# Altium PCB Apollp.PcbDoc
Units mil, origin at the board's own origin, x right, y up, seen from the top; angles counter-clockwise.
Board outline 6530 x 3625 mil, 2 copper layers (Top Layer, Bottom Layer); 146 components, 117 nets, 485 pads, 150 vias.
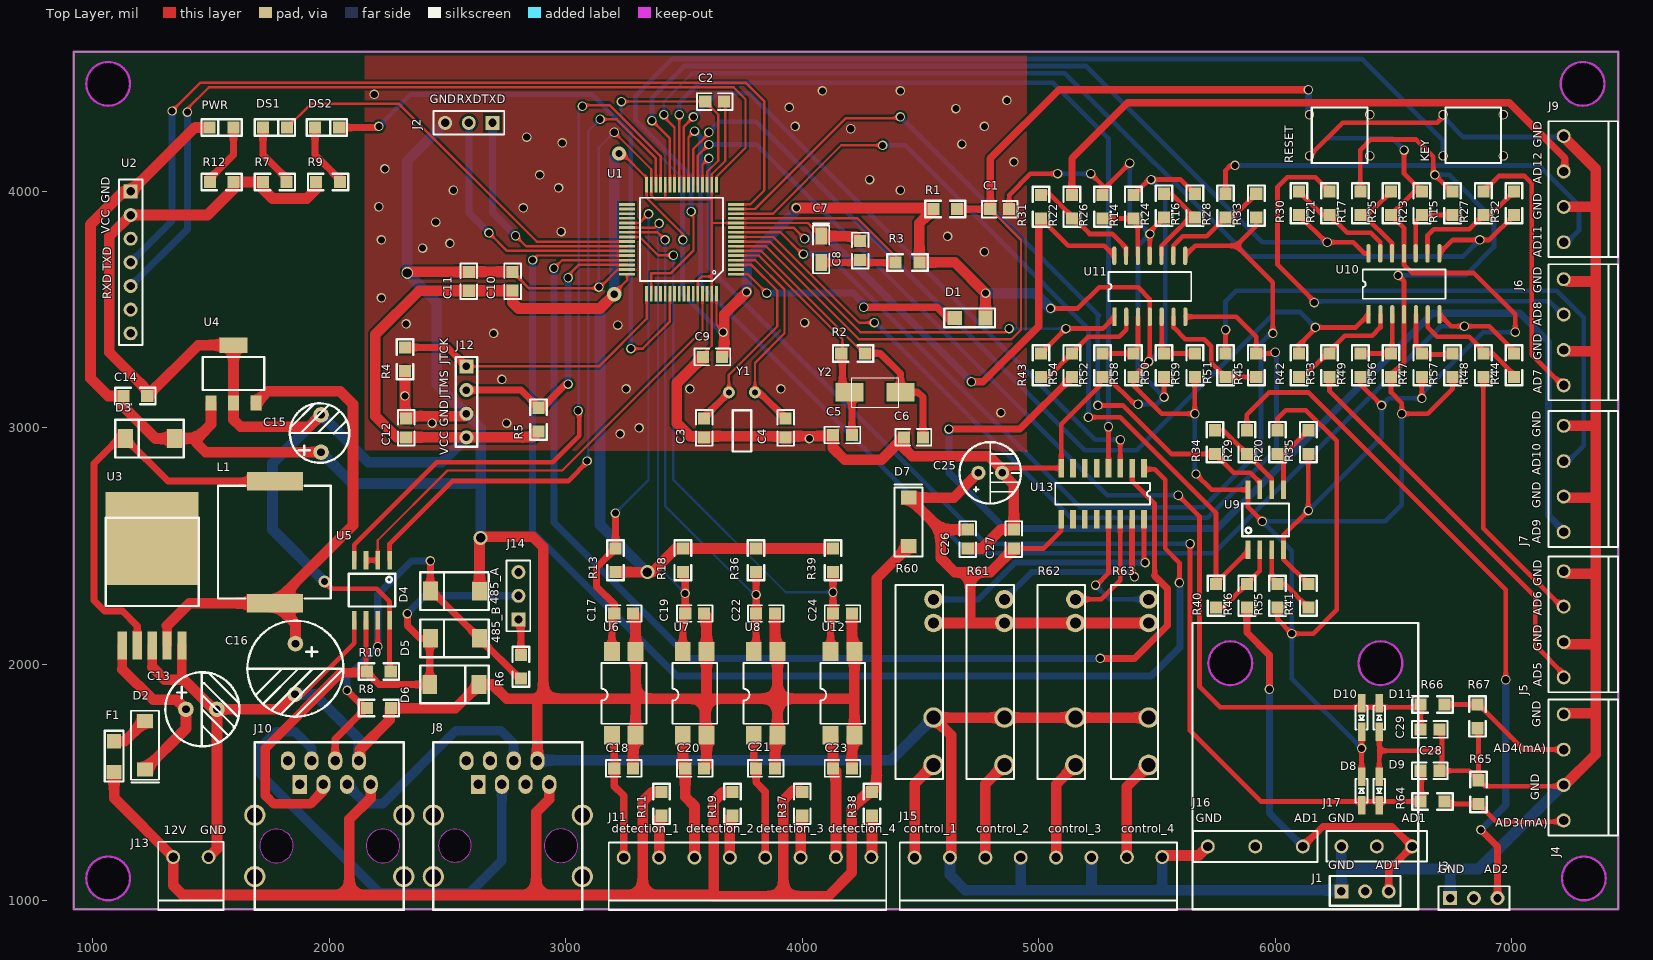
[diagram p0: Top Layer view]
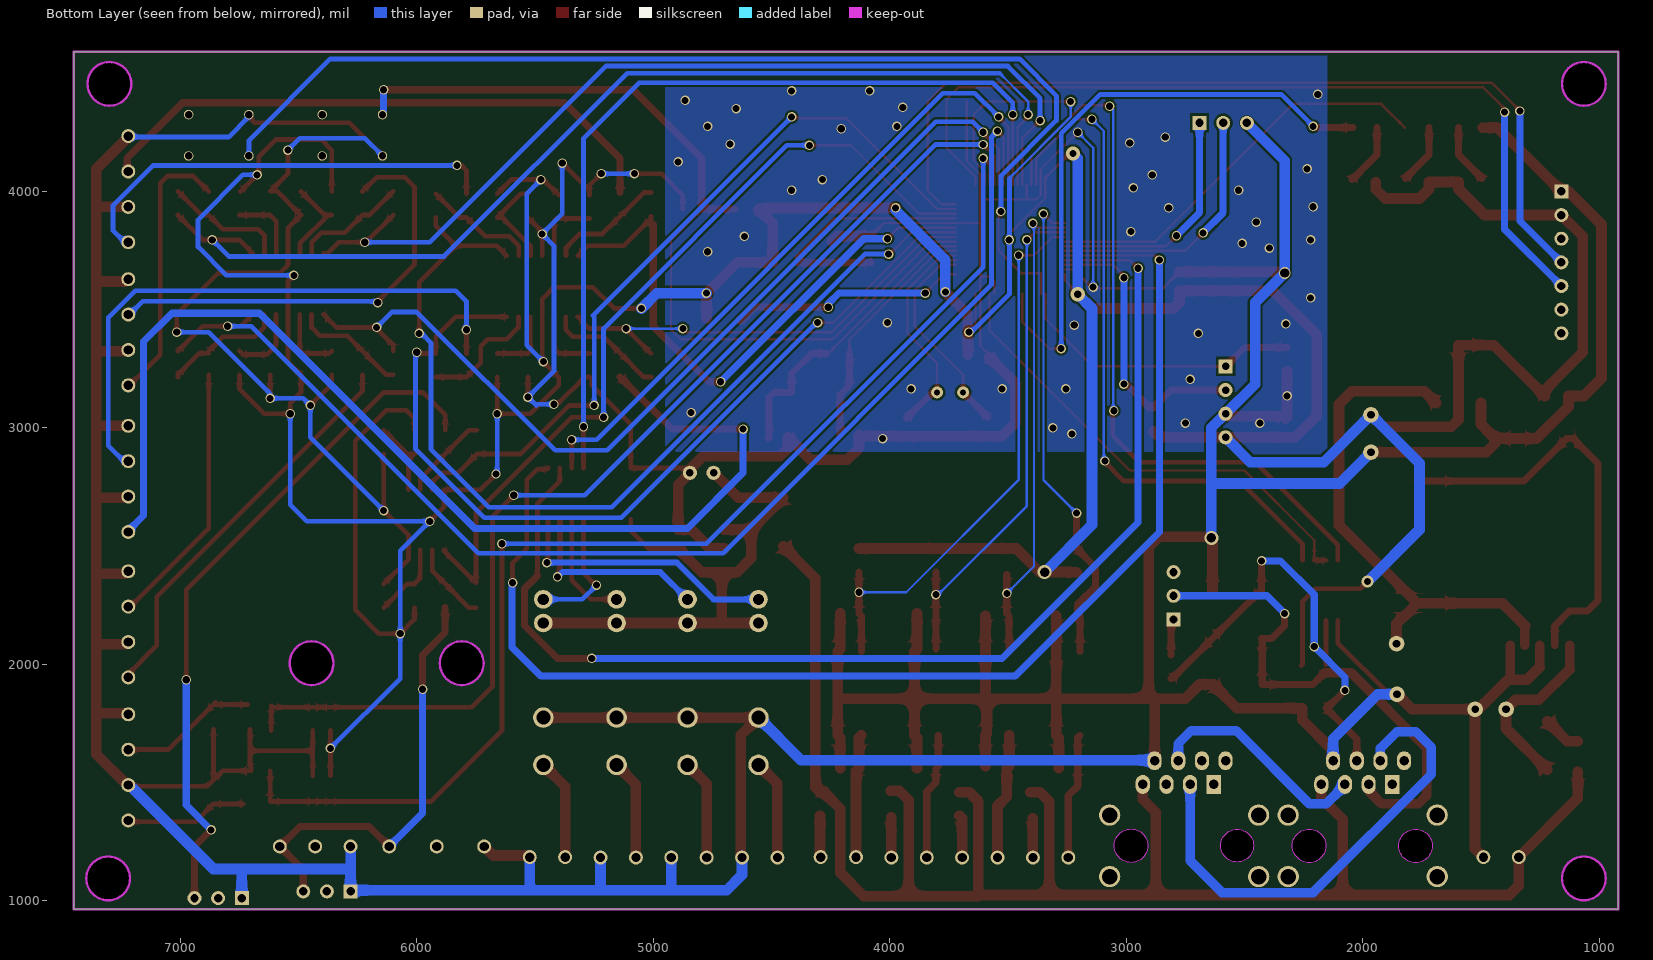
[diagram p1: Bottom Layer view, seen from below]

## Layer stack, top to bottom
Top Solder: solder mask 0.4, Solder Resist, Dk 3.5
Top Layer: signal copper 1.4
Dielectric 1: dielectric 12.6, FR-4, Dk 4.8
Bottom Layer: signal copper 1.4
Bottom Solder: solder mask 0.4, Solder Resist, Dk 3.5

## Board outline
920,965 920,4590 7450,4590 7450,965
cut-out: 1065,4362.48 cw(c1065,4455) 972.48,4455 cw(c1065,4455) 1065,4547.52 cw(c1065,4455) 1157.52,4455 cw(c1065,4455)
cut-out: 1065,1002.48 cw(c1065,1095) 972.48,1095 cw(c1065,1095) 1065,1187.52 cw(c1065,1095) 1157.52,1095 cw(c1065,1095)
cut-out: 7212.48,1095 ccw(c7305,1095) 7305,1002.48 ccw(c7305,1095) 7397.52,1095 ccw(c7305,1095) 7305,1187.52 ccw(c7305,1095)
cut-out: 7207.48,4455 ccw(c7300,4455) 7300,4362.48 ccw(c7300,4455) 7392.52,4455 ccw(c7300,4455) 7300,4547.52 ccw(c7300,4455)
cut-out: 5717.48,2005 ccw(c5810,2005) 5810,1912.48 ccw(c5810,2005) 5902.52,2005 ccw(c5810,2005) 5810,2097.52 ccw(c5810,2005)
cut-out: 6352.48,2005 ccw(c6445,2005) 6445,1912.48 ccw(c6445,2005) 6537.52,2005 ccw(c6445,2005) 6445,2097.52 ccw(c6445,2005)
cut-out: 1705.44,1232.33 ccw(c1776.5,1232.33) 1776.5,1161.26 ccw(c1776.5,1232.33) 1847.56,1232.33 ccw(c1776.5,1232.33) 1776.5,1303.39 ccw(c1776.5,1232.33)
cut-out: 2155.44,1232.67 ccw(c2226.5,1232.67) 2226.5,1161.61 ccw(c2226.5,1232.67) 2297.56,1232.67 ccw(c2226.5,1232.67) 2226.5,1303.74 ccw(c2226.5,1232.67)
cut-out: 2461.41,1233.19 ccw(c2530.87,1233.19) 2530.87,1163.73 ccw(c2530.87,1233.19) 2600.33,1233.19 ccw(c2530.87,1233.19) 2530.87,1302.65 ccw(c2530.87,1233.19)
cut-out: 2908.31,1233 ccw(c2979.37,1233) 2979.37,1161.94 ccw(c2979.37,1233) 3050.43,1233 ccw(c2979.37,1233) 2979.37,1304.07 ccw(c2979.37,1233)

## Design rules (kind name [scope] priority, off if disabled: settings)
Clearance [InPolygon] p1: gap=10
HoleSize [All] p1: absolutevalues=TRUE maxlimit=100 minlimit=10 maxpercent=80.000 minpercent=20.000
MinimumSolderMaskSliver [All] p1: minsoldermaskwidth=20
PolygonConnect [All] p1: connectstyle=Direct reliefconductorwidth=10 reliefentries=4 polygonreliefangle="90 Angle" airgapwidth=10
RoutingPriority [All] p1: routingpriority=10
RoutingVias [All] p1: holewidth=28 width=50 viastyle="Through Hole" minholewidth=28 minwidth=50 maxholewidth=28 maxwidth=50
SolderMaskExpansion [All] p1: expansion=4
Width [All] p1: maxlimit=50 minlimit=1 preferedwidth=10
27 further rules are at their usual default settings.

## Classes and differential pairs
component class Apollo_3: C25 C26 C27 C28 C29 D7 D8 D9 D10 D11 J16 J17 R60 R61 R62 R63 R64 R65 R66 R67 U13
component class Apollo_2: C13 C14 C15 C16 C17 C18 C19 C20 C21 C22 C23 C24 D2 D3 D4 D5 D6 DS1 DS2 F1 J13 J14 KEY KEY1 L1 PWR R6 R7 R8 R9 R10 R11 R12 R13 R14 R15 R16 R17 R18 R19 R20 R21 R22 R23 R24 R25 R26 R27 R28 R29 R30 R31 R32 R33 R34 R35 R36 R37 R38 R39 R40 R41 R42 R43 R44 R45 R46 R47 R48 R49 R50 R51 R52 R53 R54 R55 R56 R57 R58 R59 U2 U3 U4 U5 U6 U7 U8 U9 U10 U11 U12
component class Apollo_1: C1 C2 C3 C4 C5 C6 C7 C8 C9 C10 C11 C12 D1 J1 J2 J3 J4 J5 J6 J7 J8 J9 J10 J11 J12 R1 R2 R3 R4 R5 RESET RESET1 U1 Y1 Y2

## Components (designator, comment, footprint, x,y, rotation, side; value= is the part's Value field where it differs from the comment)
C1 "Cap" 0805C 4795,3925 r0 top
C2 "Cap" 0805C 3590,4380 r0 top
C3 "Cap" 0805C 3585,2960 r90 top
C4 "Cap" 0805C 3930,2960 r90 top
C5 "Cap" 0805C 4130,2970 r0 top
C6 "Cap" 0805C 4510,2960 r180 top
C7 "10uF" 3216T 4080,3810 r270 top
C8 "Cap" 0805c 4245,3710 r90 top
C9 "Cap" 0805C 3660,3300 r180 top
C10 "Cap" 0805C 2775,3660 r270 top
C11 "Cap" 0805C 2590,3580 r90 top
C12 "Cap" 0805C 2325,3040 r270 top
C13 "" "cap3.3-8 - duplicate" 1525,1810 r180 top
C14 "Cap" 0805 1130,3135 r0 top
C15 "Cap Pol1" C15 1965,3055 r270 top
C16 "" C16 1855,1905 r90 top
C17 "" 0805C 3285,2215 r180 top
C18 "" 0805C 3285,1560 r180 top
C19 "" 0805C 3585,2215 r180 top
C20 "" 0805C 3585,1560 r180 top
C21 "" 0805C 3885,1560 r180 top
C22 "" 0805C 3885,2215 r180 top
C23 "" 0805C 4210,1560 r180 top
C24 "" 0805C 4210,2215 r180 top
C25 "220UF" "RB 2.5/6.3" 4845,2810 r180 top
C26 "104" 0805C 4700,2490 r90 top
C27 "104" 0805C 4895,2569.8 r270 top
C28 "104" 0805C 6694.02,1550 r180 top
C29 "104" 0805C 6694.02,1725 r180 top
D1 "Diode 1N914" 1206 4775,3465 r180 top
D2 "M7" "SMA (DO-214AC)" 1220,1555 r90 top
D3 "1N5822" "smb do214aa" 1345,2955 r180 top
D4 "SMBJ6.5CA" "smb do214aa" 2635,2310 r180 top
D5 "SMBJ6.5CA" "smb do214aa" 2635,2110 r180 top
D6 "SMBJ6.5CA" "smb do214aa" 2425,1915 r0 top
D7 "M7" "SMA (DO-214AC)" 4450,2705 r270 top
D8 "1N4148" "SOD 323" 6365,1525.08 r270 top
D9 "1N4148" "SOD 323" 6440,1405 r90 top
D10 "1N4148" "SOD 323" 6365,1714.92 r90 top
D11 "1N4148" "SOD 323" 6440,1835 r270 top
DS1 "LED1" 0805-D 1719.81,4269.81 r0 top
DS2 "LED2" 0805-D 1939.81,4269.81 r0 top
F1 "PPTC" 1206 1090,1545 r90 top
J1 "Header 3" HDR1X3 6280,1040 r0 top
J2 "Header 3" HDR1X3 2690,4290 r180 top
J3 "Header 3" HDR1X3 6740,1011.54 r0 top
J4 "Header 4" "2EDG 4-3.80" 7220,1340 r0 top
J5 "Header 4" "2EDG 4-3.80" 7220,1945 r0 top
J6 "Header 4" "2EDG 4-3.80" 7220,3180 r0 top
J7 "Header 4" "2EDG 4-3.80" 7220,2560 r0 top
J8 "Header 8" RJ45 2630,1492.6 r270 top
J9 "Header 4" "2EDG 4-3.80" 7220,3785 r0 top
J10 "Header 8" RJ45 1875,1492.6 r270 top
J11 "Header 8" "2EDG 8-3.80" 3245,1183.03 r270 top
J12 "SWD" SWD 2580,3260 r0 top
J13 "Header 2" "2EDG 2-3.80" 1340,1185 r270 top
J14 "Header 3" HDR1X3 2800,2190 r90 top
J15 "Header 8" "2EDG 8-3.80" 4475,1183.03 r270 top
J16 "Header 3" "3EDG 3-5.08" 5715,1230 r270 top
J17 "Header 3" "3EDG 3-3.80" 6280,1230 r270 top
KEY "SW-PB" SWITCH 6720,4355 r0 top (schematic designator KEY1)
L1 "" l1212 1750,2755 r0 top
PWR "SYS" 0805-D 1594.81,4269.81 r180 top (schematic designator PWR1)
R1 "Res2" 0805 4655,3925 r180 top
R2 "Res2" 0805 4265,3315 r180 top
R3 "Res2" 0805 4395,3700 r0 top
R4 "Res2" 0805 2320,3240 r90 top
R5 "Res2" 0805 2885,3085 r270 top
R6 "120" 0805 2810,2040 r270 top
R7 "" 0805 1819.81,4039.4 r180 top
R8 "1K" 0805 2160,1815 r0 top
R9 "" 0805 2044.81,4039.4 r180 top
R10 "1K" 0805 2260,1970 r180 top
R11 "1.6K" 0805 3405,1460 r270 top
R12 "" 0805 1494.81,4039.4 r0 top
R13 "10K" 0805 3210,2390 r90 top
R14 "100K" 0805 5400,3985 r270 top
R15 "100K" 0805 6750,4000 r270 top
R16 "100K" 0805 5660,3990 r270 top
R17 "100K" 0805 6360,4000 r270 top
R18 "10K" 0805 3495,2490 r270 top
R19 "1.6K" 0805 3705,1460 r270 top
R20 "100K" 0805 6010,2890 r90 top
R21 "100K" 0805 6230,4000 r270 top
R22 "100K" 0805 5140,3985 r270 top
R23 "100K" 0805 6620,3900 r90 top
R24 "100K" 0805 5530,3990 r270 top
R25 "100K" 0805 6490,4000 r270 top
R26 "100K" 0805 5270,3885 r90 top
R27 "100K" 0805 6880,4000 r270 top
R28 "100K" 0805 5790,3990 r270 top
R29 "100K" 0805 5880,2890 r90 top
R30 "100K" 0805 6100,3900 r90 top
R31 "100K" 0805 5010,3885 r90 top
R32 "100K" 0805 7010,4000 r270 top
R33 "100K" 0805 5920,3990 r270 top
R34 "100K" 0805 5745,2990 r270 top
R35 "100K" 0805 6140,2990 r270 top
R36 "10K" 0805 3805,2490 r270 top
R37 "1.6K" 0805 4000,1460 r270 top
R38 "1.6K" 0805 4295,1460 r270 top
R39 "10K" 0805 4130,2490 r270 top
R40 "100K" 0805 5750,2240 r90 top
R41 "100K" 0805 6140,2240 r90 top
R42 "100K" 0805 6100,3215 r90 top
R43 "100K" 0805 5010,3215 r90 top
R44 "100K" 0805 7010,3315 r270 top
R45 "100K" 0805 5920,3315 r270 top
R46 "100K" 0805 5880,2240 r90 top
R47 "100K" 0805 6620,3315 r270 top
R48 "100K" 0805 6880,3215 r90 top
R49 "100K" 0805 6360,3315 r270 top
R50 "100K" 0805 5530,3315 r270 top
R51 "100K" 0805 5790,3315 r270 top
R52 "100K" 0805 5270,3315 r270 top
R53 "100K" 0805 6230,3215 r90 top
R54 "100K" 0805 5140,3215 r90 top
R55 "100K" 0805 6010,2240 r90 top
R56 "100K" 0805 6490,3215 r90 top
R57 "100K" 0805 6750,3215 r90 top
R58 "100K" 0805 5400,3215 r90 top
R59 "100K" 0805 5660,3215 r90 top
R60 "relay" HF49FD/012-1H11 4555,2275 r270 top
R61 "relay" HF49FD/012-1H11 4855,2275 r270 top
R62 "relay" HF49FD/012-1H11 5155,2275 r270 top
R63 "relay" HF49FD/012-1H11 5465,2275 r270 top
R64 "1K" 0805 6615,1420 r0 top
R65 "100" 0805 6860,1510.19 r270 top
R66 "1K" 0805 6615,1830 r0 top
R67 "100" 0805 6855,1730 r90 top
RESET "SW-PB" SWITCH 6155,4355 r0 top (schematic designator RESET1)
U1 "STM32F103RCT6" STM32F103RCT6 3719.84,3650 r180 top
U2 "YL-600N" HDR1X7 1160,4000 r270 top
U3 "LM2576" TO-263-5 1125,2080 r0 top
U4 "AMS1117-3.3" AMS1117-3.3 1465,3300 r0 top
U5 "SP3485" sop8 2255,2440 r270 top
U6 "EL814" SOP4 3195,1700 r90 top
U7 "EL814" SOP4 3495,1700 r90 top
U8 "EL814" SOP4 3795,1700 r90 top
U9 "LM358" sop8 5885,2485 r90 top
U10 "LM324" SOP-14 6395,3480 r90 top
U11 "LM324" SOP-14 5320,3470 r90 top
U12 "EL814" SOP4 4120,1700 r90 top
U13 "MC1413" "SOP 16-1.27/3.9" 5445,2830 r270 top
Y1 "XTAL" tc-26 3800,3150 r270 top
Y2 "8MHz" Y2 4415,3150 r180 top

## Footprints (in the part's own frame and the unit in brackets; to place one, negate y for a bottom-side part, rotate by r counter-clockwise, add the part's x,y. Pads: shape width x height; smd on the part's side, far side on the other; paste and mask are expansions set on the pad)
"2EDG 2-3.80" [mm]
  round 1.5 hole 1: 1(0,0) 2(0,3.8)
  silkscreen extent -1.65,-1.6 5.68,5.4
"2EDG 4-3.80" [mm]
  round 1.5 hole 1: 1(0,0) 2(0,3.8) 3(0,7.6) 4(0,11.4)
  silkscreen extent -1.65,-1.6 5.83,13
"2EDG 8-3.80" [mm]
  round 1.5 hole 1: 1(0,0) 2(0,3.8) 3(0,7.6) 4(0,11.4) 5(0,15.2) 6(0,19) 7(-0.05,22.8) 8(-0.05,26.6)
  silkscreen extent -1.63,-1.6 5.63,28.2
"3EDG 3-3.80" [mm]
  round 1.5 hole 1: 1(0,0) 2(0,3.8) 3(0,7.6)
  silkscreen extent -1.65,-1.6 1.6,9.2
"3EDG 3-5.08" [mm]
  round 1.5 hole 1: 1(0,0) 2(0,5.1) 3(0,10.2)
  silkscreen extent -1.65,-1.6 1.65,11.8
0805 [mm]
  rect 1.3x1.3 smd: 1(0,0) 2(2.545,0)
  silkscreen extent -0.89,-0.89 3.43,0.89
0805-D [mm]
  rect 1.3x1.3 smd: 1(0,0) 2(2.596,0)
  silkscreen extent -0.89,-0.89 3.43,0.89
0805C [mm] "0805无极性电容"
  rect 1.3x1.3 smd: 1(0,0) 2(2.027,0)
  silkscreen extent -0.9,-0.89 2.92,0.89
0805c [mm] "0805无极性电容"
  rect 1.3x1.3 smd: 1(0,0) 2(2.027,0)
  silkscreen extent -0.9,-0.89 2.92,0.89
1206 [mm]
  rect 1.5x1.6 smd: 1(0,0)
  rect 1.6x1.5 smd: 2(3.302,0)
  silkscreen extent -1.02,-1.02 4.44,1.02
3216T [mm] "3216钽电容"
  rect 1.8x1.2 smd: 1(-0.025,0) 2(2.819,0)
  silkscreen extent -1.4,-0.86 3.96,0.86
AMS1117-3.3 [mm]
  rect 1.14x1.65 smd: 1(0.889,-4.953) 2(3.302,-4.953) 3(5.715,-4.953)
  rect 3x1.65 smd: 4(3.302,1.27)
  silkscreen extent 0,-3.56 6.6,0
C15 [mil]
  round 66 hole 32: 1(0,0) 2(157.48,0)
  silkscreen extent -49,-132 203,120
C16 [mil]
  round 66 hole 32: 1(-31.5,0) 2(183.07,-1.97)
  silkscreen extent -127,-205 280,201
"cap3.3-8 - duplicate" [mil]
  round 66 hole 32: 1(0,0) 2(131.05,0)
  silkscreen extent -95,-157 218,157
HDR1X3 [mm] "Connector; Header; 3 Position"
  rect 1.5x1.5 hole 0.9: 1(0,0)
  round 1.5 hole 0.9: 2(2.54,0) 3(5.08,0)
HDR1X7 [mm] "Connector; Header; 7 Position"
  rect 1.5x1.5 hole 0.9: 1(0,0)
  round 1.5 hole 0.9: 2(2.54,0) 3(5.08,0) 4(7.62,0) 5(10.16,0) 6(12.7,0) 7(15.24,0)
  silkscreen extent -1.27,-1.27 16.51,1.27
HF49FD/012-1H11 [mm]
  round 2 hole 1.2: 1(0,0) 2(2.54,0)
  round 2.2 hole 1.5: 3(12.7,0) 4(17.78,0)
  silkscreen extent -1.52,-4.06 19.3,1.02
l1212 [mm]
  rect 6x2 smd: 1(0.508,0.508) 2(0.508,-12.608)
  silkscreen extent -5.6,-12.1 6.5,0
"RB 2.5/6.3" [mil]
  round 60 hole 32: 1(0,0) 2(100,0)
  silkscreen extent -80,-130 180,130
RJ45 [mil]
  rect 80x60 hole 40: 1(0,0)
  oval 80x60 hole 40: 2(-100,-50) 3(0,100) 4(-100,50) 5(0,200) 6(-100,150) 7(0,300) 8(-100,250)
  round 90 hole 65: 9(129.92,-189.76) 10(129.92,440.16) 11(390,-190) 12(390,440)
  silkscreen extent -179,-190 530,440
"SMA (DO-214AC)" [mm]
  rect 1.5x1.7 smd: 1(0,0) 2(5.213,0)
  silkscreen extent -1.4,-1.52 6.33,1.47
"smb do214aa" [mm]
  rect 1.6x2 smd: 1(0,0) 2(5.273,-0.003)
  silkscreen extent -1.02,-2.03 6.35,2.03
"SOD 323" [mm]
  rect 2x0.8 smd: 1(0,0) 2(3.05,0)
  silkscreen extent 0.25,-0.63 2.79,0.64
SOP4 [mm]
  rect 2x1.7 smd: 1(0,0) 2(0,-2.55) 3(9,-2.55) 4(9,0)
  silkscreen extent 1.25,-3.7 7.75,1.1
sop8 [mm]
  rect 2x0.5 smd: 1(0,0) 2(0,-1.27) 3(0,-2.54) 4(0,-3.81) 5(6.45,-3.81) 6(6.45,-2.54) 7(6.45,-1.27) 8(6.45,0)
  silkscreen extent 1.46,-4.4 4.96,0.6
"SOP 16-1.27/3.9" [mm] "150mil body,"
  rect 2x0.6 smd: 1(0,0) 2(0,-1.27) 3(0,-2.54) 4(0,-3.81) 5(0,-5.08) 6(0,-6.35) 7(0,-7.62) 8(0,-8.89) 9(5.5,-8.89) 10(5.5,-7.62) 11(5.5,-6.35) 12(5.5,-5.08) 13(5.5,-3.81) 14(5.5,-2.54) 15(5.5,-1.27) 16(5.5,0)
  silkscreen extent 1.58,-9.53 3.92,0.64
SOP-14 [mm]
  rect 2x0.45 smd: 1(0,0)
  oval 2x0.45 smd: 2(0,-1.27) 3(0,-2.54) 4(0,-3.81) 5(0,-5.08) 6(0,-6.35) 7(0,-7.62) 8(6.55,-7.6) 9(6.55,-6.33) 10(6.55,-5.06) 11(6.55,-3.79) 12(6.55,-2.52) 13(6.55,-1.25) 14(6.55,0.02)
  silkscreen extent 1.68,-8.25 4.82,0.64
STM32F103RCT6 [mm]
  rect 1.7x0.3 smd: 1(0,0) 2(0,-0.5) 3(0,-1) 4(0,-1.5) 5(0,-2) 6(0,-2.5) 7(0,-3) 8(0,-3.5) 9(0,-4) 10(0,-4.5) 11(0,-5) 12(0,-5.5) 13(0,-6) 14(0,-6.5) 15(0,-7) 16(0,-7.5) 33(11.7,-7.5) 34(11.7,-7) 35(11.7,-6.5) 36(11.7,-6) 37(11.7,-5.5) 38(11.7,-5) 39(11.7,-4.5) 40(11.7,-4) 41(11.7,-3.5) 42(11.7,-3) 43(11.7,-2.5) 44(11.7,-2) 45(11.7,-1.5) 46(11.7,-1) 47(11.7,-0.5) 48(11.7,0)
  rect 0.3x1.7 smd: 17(2.1,-9.6) 18(2.6,-9.6) 19(3.1,-9.6) 20(3.6,-9.6) 21(4.1,-9.6) 22(4.6,-9.6) 23(5.1,-9.6) 24(5.6,-9.6) 25(6.1,-9.6) 26(6.6,-9.6) 27(7.1,-9.6) 28(7.6,-9.6) 29(8.1,-9.6) 30(8.6,-9.6) 31(9.1,-9.6) 32(9.6,-9.6) 49(9.6,2.1) 50(9.1,2.1) 51(8.6,2.1) 52(8.1,2.1) 53(7.6,2.1) 54(7.1,2.1) 55(6.6,2.1) 56(6.1,2.1) 57(5.6,2.1) 58(5.1,2.1) 59(4.6,2.1) 60(4.1,2.1) 61(3.6,2.1) 62(3.1,2.1) 63(2.6,2.1) 64(2.1,2.1)
  silkscreen extent 1.38,-8.21 10.31,0.71
SWD [mil]
  rect 60x60 hole 32: 1(0,0)
  round 60 hole 32: 2(0,-100) 3(0,-200) 4(0,-300)
  silkscreen extent -45,-340 45,40
SWITCH [mil]
  round 40 hole 31.5: 1(-10,-30) 2(-10,-205) 3(245,-205) 4(245,-30)
  silkscreen extent 0,-235 235,0
tc-26 [mm]
  round 1.27 hole 0.635: 1(0,0) 2(0,-2.8)
  silkscreen extent 1.92,-2.4 6.35,-0.4
TO-263-5 [mm]
  rect 1x3 smd: 1(0,0) 2(1.6,0) 3(3.2,0) 4(4.8,0) 5(6.4,0)
  rect 10x10 smd: 6(3.2,11.5)
  silkscreen extent -1.8,4.24 8.2,13.7
Y2 [mm]
  rect 3x2 smd: 1(0,0) 2(5.45,0)
  silkscreen extent 0.2,-1.6 5.2,1.6

## Part data
C1 C2 C3 C4 C5 C6 C8 C9 C10 C11 C12 C14: "Capacitor"
C7: library part CAP-POL1
C13 C16 C17 C18 C19 C20 C21 C22 C23 C24: library part Cap, "Capacitor"
C15: "Polarized Capacitor (Radial)"
C25: library part CAP-POL2
C26 C27 C28 C29: library part CAP
D1: "High Conductance Fast Diode"
D3: library part "D Zener", "Zener Diode"
DS1 DS2 PWR: library part LED0, "Typical INFRARED GaAs LED"
J1 J2 J3 J14 J16 J17: "Header, 3-Pin"
J4 J5 J6 J7 J9: "Header, 4-Pin"
J8 J10 J11 J15: "Header, 8-Pin"
J13: "Header, 2-Pin"
KEY RESET: "Switch"
L1: library part Inductor, "Inductor"
R1 R2 R3 R4 R5: "Resistor"
R6 R8 R10 R11 R13 R14 R15 R16 R17 R18 R19 R20 R21 R22 R23 R24 R25 R26 R27 R28 R29 R30 R31 R32 R33 R34 R35 R36 R37 R38 R39 R40 R41 R42 R43 R44 R45 R46 R47 R48 R49 R50 R51 R52 R53 R54 R55 R56 R57 R58 R59: library part Res
R7 R9 R12: library part Res2, "Resistor"
R64 R65 R66 R67: library part RES
U2: library part "Header 7", "Header, 7-Pin"
U6 U7 U8 U12: library part TLP281
U10 U11: library part LM324N
Y1: "Crystal Oscillator"
Y2: library part XTAL, "Crystal Oscillator"

## Via types
v1: diameter 40, hole 30, Top Layer to Bottom Layer, tented both sides, 125 vias
v2: diameter 40, hole 30, Top Layer to Bottom Layer, 19 vias
v3: diameter 60, hole 30, Top Layer to Bottom Layer, tented both sides, 2 vias
v4: diameter 60, hole 40, Top Layer to Bottom Layer, tented both sides, 2 vias
v5: diameter 50, hole 30, Top Layer to Bottom Layer, tented both sides, 1 vias
v6: diameter 50, hole 40, Top Layer to Bottom Layer, tented both sides, 1 vias

## Nets (pads, with @x,y where several pads share a name; then routed paths per layer and width w, separated by ;. In a path a pad name is that pad's centre, name@x,y a point inside that pad or via, vN(x,y) a via of type N, cw(c..) or ccw(c..) an arc to the next point about the centre after c; other vN are vias at no path point)
32.768K: C3.2 U1.3 Y1.2 | length 884.1
  Top Layer w10: Y1.2 3689.76,3224.76 3895,3430 3895,3580 3785.63,3689.37 U1.3
  Top Layer w30: C3.2@3585,3044.8 3689.76,3149.57 Y1.2
485_A: D5.2 D6.1 J10.3 J14.2 R10.2 U5.6 | length 2412
  Top Layer w20: 2155,1999.81 U5.6 ; D5.2@2425,2107.71 D5.2
  Top Layer w30: R10.2@2159.81,1965.19 2210,1915 D6.1 D5.2@2425,2107.71 ; v1(2330,2215) 2330,2165 2384.88,2110.12 D5.2
  Top Layer w40: J10.3 1975,1465 1920,1410 1765,1410 1730,1445 1730,1645 2050,1965 R10.2@2160,1965
  Bottom Layer w30: v1(2330,2215) 2405,2290 J14.2
485_A1: J8.3 J10.4 | length 2043.9
  Bottom Layer w40: J10.4 1925,1645 1855,1715 1775,1715 1710,1650 1710,1535 2210,1035 2595,1035 2730,1170 J8.3
485_B: D4.2 D5.1 J10.6 R6.2 R8.1 U5.7 | length 1902.1
  Top Layer w20: v1(2205,2075) U5.7
  Top Layer w30: J10.6 2025,1685 2155,1815 2150,1815 v1(2075,1890) ; v1(2427.41,2437.59) D4.2 2434.88,2310.12 D5.1 2805.19,1939.81 R6.2
  Bottom Layer w30: v1(2075,1890) 2075,1945 v1(2205,2075) 2205,2295 2347.59,2437.59 v1(2427.41,2437.59)
485_B1: J8.6 J10.5 | length 961.7
  Bottom Layer w40: J10.5@2075,1490 2155,1410 2225,1410 2535,1720 2725,1720 2780,1665 J8.6
AD1: J1.3 J16.3 J17.3 R46.1 | length 1882.1
  Top Layer w30: R46.1 5880,2135 5975,2040 v1(5975,1895) ; J16.3 6201.57,1315 6494.21,1315 J17.3 6480,1130.79 ; J1.3@6480,1045 6480,1145.79
  Bottom Layer w30: v1(5975,1895) 5975,1371.57 J16.3
AD2: J3.3 R29.2 | length 2917.5
  Top Layer w20: R29.2 5880,3055 5975,3150 6140,3150 6975,2315 v1(6975,1935)
  Top Layer w30: v1(6870,1300) 6940,1230 J3.3@6940,1015
  Bottom Layer w30: v1(6870,1300) 6975,1405 v1(6975,1935)
AD3: J4.1 R64.2 R65.2 | length 490.9
  Top Layer w20: R64.2@6735.19,1410 R65.2 6935,1335 J4.1@7195,1335
AD4: J4.3 R66.2 R67.2 | length 607.7
  Top Layer w20: R66.2 6854.81,1830 R67.2 ; R67.2@6850,1840 7050,1640 J4.3@7235,1640
AD5: J5.1 R53.1 | length 1682.1
  Top Layer w20: R53.1@6230,3225 6230,3155 7100,2285 7100,2080 J5.1@7225,1955
AD6: J5.3 R48.1 | length 1123.8
  Top Layer w20: R48.1@6880,3225 6880,2575 J5.3@7215,2240
AD7: J6.1 R27.1 | length 1167.3
  Top Layer w20: R27.1 6945,4065 7055,4065 7085,4035 7085,3310 J6.1@7225,3170
AD8: J6.3 R21.1 | length 1907.9
  Top Layer w20: v1(6165,3530) 6165,3535 6010,3690 6010,4020 6050,4060 6170,4060 R21.1
  Bottom Layer w20: v1(6165,3530) 6165,3535 7159.21,3535 J6.3@7225,3469.21
AD9: J7.1 R54.1 | length 4662.9
  Top Layer w30: v1(4620,2995) 4920,2995 R54.1
  Bottom Layer w30: v1(4620,2995) 4620,2810 4855,2575 5755,2575 6665,3485 7035,3485 7155,3365 7155,2635 ; 7155,2630 J7.1@7210,2575
AD10: J7.3 R51.1 | length 2443.3
  Top Layer w20: R51.1 v1(5790,3415)
  Bottom Layer w20: v1(5790,3415) 5790,3535 5835,3580 7190,3580 7302.5,3467.5 ; J7.3@7232.11,2852.11 7305,2925 7305,3467.5
AD11: J9.1 R28.1 | length 1863.6
  Top Layer w20: R28.1 5790,4090 5810,4110 v1(5830,4110)
  Bottom Layer w20: v1(5830,4110) 7115,4110 7285,3940 7285,3835 J9.1@7225,3775
AD12: J9.3 R22.1 | length 2490.5
  Top Layer w30: R22.1@5140,3995 5140,4140 5375,4375 6990,4375 7225,4140 J9.3@7225,4074.21
GND: C1.2 C2.2 C3.1 C4.1 C5.1 C6.2 C7.1 C8.2 C9.2 C10.1 C11.2 C12.1 C13.1 C14.1 C15.2 C16.1 C17.1 C18.1 C19.1 C20.1 C21.1 C22.1 C23.1 C24.1 C25.1 C26.1 C27.1 C28.1 C29.1 D3.1 D4.1 D6.2 D9.2 D11.2 J1.1 J2.3 J3.1 J4.2 J4.4 J5.2 J5.4 J6.2 J6.4 J7.2 J7.4 J8.8 J9.2 J9.4 J10.8 J12.3 J13.2 J15.2 J15.4 J15.6 J15.8 J16.1 J17.1 KEY.1 PWR.2 R4.1 R8.2 R23.2 R24.2 R25.2 R26.2 R35.2 R41.2 R47.2 R49.2 R50.2 R52.2 R60.3 R61.3 R62.3 R63.3 R65.1 R67.1 RESET.2 U1.12 U1.18 U1.28 U1.31 U1.47 U1.60 U1.63 U2.1 U3.3 U3.5 U4.1 U5.5 U6.2 U6.3 U7.2 U7.3 U8.2 U8.3 U9.4 U10.11 U11.11 U12.2 U12.3 U13.8 | length 41532.2
  Top Layer w10: C10.1 2845,3590 3140,3590 3219.68,3669.68 U1.47 ; v1(3205,4250) 3361.58,4093.42 U1.31 3361.58,3983.42 3379,3966 3617.48,3966 3617.48,4072.48 3674.8,4129.8 C2.2@3674.8,4380 ; 3420.63,3970.37 U1.28 ; U1.60 3558.42,3623.42 3575,3640 3617.48,3640 ; C9.2 3580.2,3310.2 3617.48,3347.48 U1.63 3617.48,3640 ; 3617.48,3965 3617.48,3640 ; 3619.02,3866.53 U1.12 4024.47,3866.53 C7.1
  Top Layer w20: C16.1 1888.5,1873.5 2105,2090 U5.5 ; C25.1 4865,2830 U13.8 5095,3015 5260,3180 5260,3204.81 R52.2 5290.19,3214.81 5405,3100 v1(5420,3100) ; C1.2 4874.8,3984.8 4965,4075 v1(5080,4075) ; v1(5220,4075) 5270,4025 R26.2@5270,4005 ; R26.2 R26.2@5270,4005 ; v1(5385,4120) R26.2@5270,4005 ; U11.11 5469.21,3829.02 R24.2 ; v1(5530,3130) R50.2 ; R41.2 6035,2445.19 U9.4 6035,2545 v1(6140,2650) R35.2 ; RESET.2 6285,4290 6685,4290 KEY.1@6710,4315 ; R49.2@6360,3224.81 6360,3185 v1(6450,3095) ; D9.2@6440,1528.43 D11.2@6440,1721.57 ; 6440,1635 6705,1635 ; v1(6545,4175) 6545,4075.19 R23.2 6590.38,4000.19 R25.2 6544.21,3845.6 U10.11 6544.21,3690.79 6580,3655 6840,3655 7015,3480 v1(7015,3405) ; v1(6620,3125) R47.2@6620,3224.81 ; C29.1@6705,1725 6705,1570 6700,1565 6700,1550 6820.19,1550 6885.19,1485 7215,1485 J4.2@7222.5,1492.5 ; R65.1 R67.1@6860,1725
  Top Layer w40: 1250.98,1989.02 U3.3 ; 1376.97,1943.03 U3.5
  Top Layer w45: 1130,4000 990,3860 990,3210 1065,3135 C14.1 1130,3090 1265,2955 D3.1 1440,2955 ; U2.1 1429.81,4269.81 PWR.2 ; 1250.98,1989.02 1305,1935 1376.97,1935 ; 1376.97,1943.03 1510,1810 C13.1 ; J13.2 1525,1220.39 C13.1 ; U4.1 1500,3015 1440,2955 ; C16.1 1791.5,1810 C13.1 ; C15.2 1477.48,2897.52 1440,2935 1440,2955 ; J10.8@2130,1580 2130,1640 2255.19,1765.19 2255.19,1815 2532.71,1815 D6.2 2690.12,1914.88 2750,1855 2865,1855 ; C12.1@2320,3045 R4.1 ; C12.1 2335,3050 2570,3050 J12.3 ; v6@2329.8,3659.8 C11.2 ; C11.2@2590.2,3660 C10.1 ; D4.1@2635,2305 D4.1 2635,2540 2860,2540 2905,2495 2905,1855 ; J8.8 2880,1840 2865,1855 ; C18.1 3285,1689.61 U6.2 3295.39,1854.61 ; C17.1@3295.39,2204.61 U6.3 3295.39,1855 ; C9.2 3470,3189.8 3470,3020 3525,2965 3585,2965 4125,2965 C5.1 4130,2915 4180,2865 4335.2,2865 C6.2 4430.2,2914.8 4465,2880 4790,2880 4845,2825 C25.1 4895,2760 4895,2570 4840,2570 4760,2490 C26.1 ; C20.1@3595.39,1570.39 U7.2 3590,1705.39 3590,1855 ; 3595.39,1860.39 U7.3 C19.1@3595.39,2204.61 ; C21.1 U8.2@3885,1689.61 ; U8.3@3885,2064.72 C22.1 ; U8.2 3895.39,1855 ; U8.3 3895.39,1855 ; C7.1 4223.8,3811 C8.2 ; C23.1 U12.2@4210,1689.61 ; C24.1 4210,2064.72 U12.3 4220.39,1854.61 ; U12.2 4220.39,1854.61 ; J15.2@4630,1190 4630,1700 R60.3 R61.3 R62.3 R63.3 ; J15.8@5522.24,1191.97 5676.97,1191.97 J16.1 ; J9.2 7339.61,3934.61 ; J4.2@7225,1489.61 7355,1619.61 7355,4095 J9.4@7230,4220 ; J5.2@7230,2084.61 7349.61,2084.61 ; J4.4@7235,1793.82 7353.82,1793.82 ; J5.4@7235,2383.82 7353.82,2383.82 ; J7.2@7235,2704.61 7350.39,2704.61 ; J7.4@7235,3008.82 7353.82,3008.82 ; J6.2@7235,3324.61 7350.39,3324.61 ; J6.4@7235,3618.82 7353.82,3618.82 ; 2865,1855 2905,1855 ; 2905,1855 3295,1855 3295.39,1854.61 ; 3295.39,1854.61 3295.39,1855 ; 3295.39,1855 3590,1855 ; 3590,1855 3895.39,1855 ; 3895.39,1855 4220,1855 4220.39,1854.61
  Bottom Layer w10: v1(3140,3595) 3140,4185 v1(3205,4250)
  Bottom Layer w20: v1(5080,4075) v1(5220,4075) ; v1(5385,4120) 5385,3905 v1(5470,3820) 5420,3770 5420,3240 v1(5530,3130) 5495,3095 5490,3100 v1(5420,3100) ; v1(6140,2650) 6450,2960 v1(6450,3095) 6480,3125 v1(6620,3125) 6620,3145 6880,3405 v1(7015,3405) ; RESET.2 6220,4225 6495,4225 v1(6545,4175) ; KEY.1@6710,4315 6795,4230 J9.4@7225,4230
  Bottom Layer w45: C16.1 1936.5,1873.5 2125,1685 J10.8 ; C15.2 2097.52,2765 2630,2765 ; J2.3 2330,4130 v6(2330,3655) 2455,3530 2455,3185 J12.3 2640,3000 v4(2640,2535) ; J8.8@2880,1595 4375,1595 R60.3 ; J15.2@4624.61,1190 4624.61,1110.2 4689.8,1045 6280,1045 J17.1 J17.1@6280,1235 ; 4923.82,1050 J15.4@4923.82,1190 ; 5223.03,1050 J15.6@5223.03,1190 ; 5509.49,1050 5522.24,1062.76 J15.8@5522.24,1191.97 ; 6285,1135 6735,1135 6740,1130 ; J3.1@6740,1040 6740,1130 ; J4.2@7202.5,1477.5 6860,1135 6745,1135 6740,1130
  other v1: 4030,2955 3230,2975 3310,3000 4840,3065 3255,3165 2695,3400 3220,3435 4010,3445 4770,3745 2395,3760 2510,3780 2220,3795 4615,3810 2525,4005 2970,4015 4285,4050 2890,4070 4895,4125 4675,4200 3970,4275 4770,4275 3945,4355 4865,4385 4085,4425 4415,4425
  other v2: 2435,3020 2750,3020 2320,3135 3525,3165 3910,3165 2730,3205 2325,3440 2220,3550 2980,3830 2450,3870 2820,3930 2210,3935 4415,4005 2235,4095 2985,4205 2835,4230 4205,4265 4650,4350 2190,4410
JTCK: J12.1 R4.2 U1.49 | length 1244.2
  Top Layer w10: J12.1 3140,3260 3341.89,3461.89 U1.49
  Top Layer w30: R4.2 2499.81,3340.19 J12.1
JTMS: J12.2 R5.1 U1.46 | length 1220.1
  Top Layer w10: v1(3010,3635) 3010,3645 3054.37,3689.37 U1.46
  Top Layer w30: J12.2 2810,3160 R5.1 2900,3085 3000,3185 v1(3010,3185)
  Bottom Layer w30: v1@3010,3195 v1(3010,3635)
KEY1: KEY.2 U1.50 | length 4758.1
  Top Layer w10: U1.50 3361.57,3653.43 3443.43,3653.43 3540,3750 3540,3890 3530,3900 v1(3530,3915)
  Bottom Layer w20: v1(3530,3915) 3530,4065 3295,4300 3295,4405 3450,4560 6365,4560 6710,4215 KEY.2@6710,4140
LED0: DS1.2 U1.41 | length 1719.9
  Top Layer w10: DS1.2 1922.19,4370 2295,4370 2877.2,3787.8 U1.41
LED1: DS2.2 U1.54 | length 2592.2
  Top Layer w10: v1(3275,3335) 3325,3335 3440.31,3450.31 U1.54
  Top Layer w30: DS2.2 v1@2204.81,4269.81
  Bottom Layer w20: v1(2210,4275) 2345,4410 3110,4410 3275,4245 v1(3275,3335)
NetC4_2: C4.2 U1.4 Y1.1 | length 919
  Top Layer w10: U1.4 3800.94,3709.06 3925,3585 3925,3400 3800,3275 Y1.1
  Top Layer w30: Y1.1 3819.8,3150 C4.2
NetC5_2: C5.2 R2.2 U1.5 Y2.2 | length 1018.2
  Top Layer w10: U1.5 3816.26,3728.74 4170,3375 R2.2@4170,3315
  Top Layer w30: R2.2@4170,3315 4170,3180.43 Y2.2 4209.8,3140.63 C5.2
NetC6_1: C6.1 R2.1 U1.6 Y2.1 | length 1282
  Top Layer w10: U1.6 3826.57,3748.43 R2.1@4275,3300
  Top Layer w30: R2.1 4330,3315 4415,3230 Y2.1 4490,3150 4510,3130 C6.1 ; C6.1@4515,2957.38 C6.1@4515,2960
NetC7_2: C7.2 C8.1 R3.1 U1.13 | length 1096.9
  Top Layer w10: U1.13 4233.78,3886.22 4395,3725 R3.1 ; C7.2 C7.2@4080,3715
  Top Layer w30: C7.2 R3.1@4394,3699
NetC13_2: C13.2 D2.1 U3.1 | length 766.4
  Top Layer w40: 1125,1980 U3.1
  Top Layer w45: 1125,1980 1255,1850 1353.95,1850 C13.2 1393.95,1728.95 D2.1
NetD1_2: D1.2 U1.1 | length 1028
  Top Layer w10: U1.1 3770,3650 v1(3850,3570) ; D1.2@4630,3450 D1.2
  Top Layer w30: v1(4260,3510) 4570,3510 D1.2@4630,3450
  Bottom Layer w10: v1(3850,3570) v1@3850,3575
  Bottom Layer w30: v1(3850,3570) 4215,3570 4260,3525 v1(4260,3510)
NetD2_2: D2.2 F1.2 | length 165.3
  Top Layer w45: F1.2 1134.78,1675 D2.2
NetD3_2: D3.2 L1.1 U3.2 | length 1772.9
  Top Layer w30: U3.2 1187.99,2162.01 1125,2225 1050,2225 1005,2270 1005,2850 1110.12,2955.12 D3.2 1317.53,2775 L1.1
NetDS1_1: DS1.1 R7.1 | length 256.4
  Top Layer w30: DS1.1 1719.81,4154.81 R7.1@1819.81,4054.81
NetDS2_1: DS2.1 R9.1 | length 263.5
  Top Layer w30: DS2.1 1939.81,4154.81 R9.1@2044.81,4049.81
NetJ14_1: J14.1 R6.1 | length 154.1
  Top Layer w30: J14.1 2810,2180 R6.1
NetPWR1_1: PWR.1 R12.1 | length 256.4
  Top Layer w30: R12.1@1494.81,4054.81 1594.81,4154.81 PWR.1
NetR14_2: R14.2 R26.1 U11.12 | length 300.8
  Top Layer w20: R26.1 5409.81,3885 5419.21,3875.6 U11.12
NetR15_2: R15.2 R23.1 U10.10 | length 302.6
  Top Layer w20: U10.10 6594.21,3874.21 R23.1 ; R23.1@6620.19,3899.81 R15.2
NetR16_2: R16.2 R24.1 U11.10 | length 403.6
  Top Layer w20: U11.10 5519.21,3769.21 5639.81,3889.81 R16.2 5559.81,3990 R24.1
NetR17_2: R17.2 R25.1 U10.12 | length 382.7
  Top Layer w20: R17.2 R17.2@6375.19,3899.81 ; R25.1 6389.81,3899.81 R17.2@6375.19,3899.81 ; U10.12 6494.21,3780.79 R17.2@6375.19,3899.81
NetR20_1: R20.1 R35.1 U9.5 | length 332.8
  Top Layer w20: U9.5 6035,2865 R20.1 6040,2890 R35.1
NetR21_2: R21.2 R30.2 U10.13 | length 480.9
  Top Layer w20: R30.2 6200.38,3899.81 R21.2 6304.81,3825 6405,3825 6444.21,3785.79 U10.13
NetR22_2: R22.2 R31.2 U11.13 | length 489.2
  Top Layer w20: R31.2@5010,3995.19 5039.62,3995.19 5140,3894.81 5214.81,3820 5310,3820 5369.21,3760.79 U11.13
NetR27_2: R27.2 R32.1 U10.9 | length 519.1
  Top Layer w20: U10.9 6644.21,3814.21 6670,3840 6820.19,3840 R27.2 6909.81,3899.81 R32.1
NetR28_2: R28.2 R33.1 U11.9 | length 483.6
  Top Layer w20: U11.9 5569.21,3769.21 5610,3810 5710.19,3810 R28.2 5819.81,3889.81 R33.1
NetR29_1: R29.1 R34.1 U9.6 | length 371
  Top Layer w20: R34.1 5780,2990 R29.1 5985,2785 U9.6
NetR40_1: R40.1 R46.2 U9.2 | length 339.1
  Top Layer w20: R40.1 5779.81,2240 R46.2 5935,2395.19 U9.2
NetR41_1: R41.1 R55.2 U9.3 | length 326.7
  Top Layer w20: U9.3 5985,2365.19 R55.2 6039.81,2340.19 R41.1
NetR42_1: R42.1 R53.2 U10.2 | length 482.8
  Top Layer w20: R42.1@6100,3225 6129.81,3225 6230,3325.19 6294.81,3390 6410,3390 6445,3425 U10.2
NetR43_1: R43.1 R54.2 U11.2 | length 497.8
  Top Layer w20: R43.1 5039.81,3215 R54.2 5209.81,3385 5340,3385 5370,3415 U11.2
NetR44_2: R44.2 R48.2 U10.6 | length 508.8
  Top Layer w20: U10.6 6645,3425 6685,3385 6820.19,3385 R48.2@6880,3325.19 ; R48.2 6919.62,3315.19 7010,3224.81 R44.2
NetR45_2: R45.2 R51.2 U11.6 | length 523.2
  Top Layer w20: U11.6 5570,3425 5620,3375 5700,3375 5730,3345 5730,3274.81 R51.2 R45.2
NetR47_1: R47.1 R57.2 U10.5 | length 307.9
  Top Layer w20: U10.5 6595,3350 6635,3310 6734.81,3310 R57.2@6750,3325.19
NetR49_1: R49.1 R56.2 U10.3 | length 295.2
  Top Layer w20: R49.1@6360,3325 6370,3315 6479.81,3315 6495,3330.19 U10.3
NetR50_1: R50.1 R59.2 U11.5 | length 289.2
  Top Layer w20: U11.5 5520,3325 R50.1 5659.81,3315 R59.2
NetR52_1: R52.1 R58.2 U11.3 | length 293.2
  Top Layer w20: R52.1 5399.81,3315 R58.2 5420,3335.19 U11.3
NetR60_1: R60.1 U13.16 | length 1144.7
  Top Layer w20: U13.16 5445,2435 v1(5450,2430)
  Bottom Layer w25: R60.1 4745,2275 4900,2430 v1(5450,2430)
NetR61_1: R61.1 U13.15 | length 853.5
  Top Layer w25: U13.15 5395,2380 v1(5405,2370)
  Bottom Layer w25: R61.1 4970,2390 5385,2390 v1(5405,2370)
NetR62_1: R62.1 U13.14 | length 481.6
  Top Layer w20: R62.1 5265,2275 5345,2355 U13.14
NetR63_1: R63.1 U13.13 | length 554
  Top Layer w20: v1(5240,2335) 5245,2335 5295,2385 U13.13
  Bottom Layer w20: v1(5240,2335) 5300,2275 R63.1
PA0: R40.2 U1.14 U9.1 | length 3509.4
  Top Layer w10: U1.14 3875.91,3905.91 4165,4195 v1(4340,4195) ; R40.2 R40.2@5750,2345
  Top Layer w20: v1(5210,3045) 5345,3045 5750,2640 5750,2345 5885,2480 U9.1
  Bottom Layer w20: v1(4340,4195) 4435,4195 5210,3420 v1(5210,3045)
PA1: R34.2 U1.15 U9.7 | length 3280.1
  Top Layer w10: U1.15 3800.59,3925.59 4185,4310 v1@4420,4310
  Top Layer w20: v1(5250,3095) 5355,3095 5560.19,2889.81 R34.2 5824.81,2810 5895,2810 5935,2770 U9.7
  Bottom Layer w10: 5250,3470 5255,3475
  Bottom Layer w20: v1(4415,4315) 5255,3475 ; v1(5250,3095) 5250,3470
PA2: U1.16 U2.4 | length 3816.1
  Top Layer w10: v1@1335,4350 1345,4350 1455,4460 3760,4460 3840,4380 3840,4005 3780.28,3945.28 U1.16
  Bottom Layer w30: U2.4 1335,3875 v1(1335,4340)
PA3: U1.17 U2.5 | length 3680.3
  Top Layer w10: v1(1400,4335) 1400,4350 1490,4440 3710,4440 3760,4390 3760,4185 3637.17,4062.17 U1.17
  Bottom Layer w30: U2.5 1400,3840 v1(1400,4335)
PA4: C28.2 D8.2 D9.1 R64.1 U1.20 | length 5116.9
  Top Layer w10: U1.20 3578.11,4113.11 v1(3605,4140)
  Top Layer w20: v1(5640,2510) 5640,1720 5940,1420 R64.1@6610,1420 ; R64.1@6620.2,1420.2 C28.2@6620.2,1550
  Bottom Layer w20: v1(3605,4140) 3605,3680 4775,2510 v1(5640,2510)
PA5: C29.2 D10.2 D11.1 R66.1 U1.21 | length 4707.9
  Top Layer w10: U1.21 3558.43,4151.75 v1(3605,4198.32)
  Top Layer w20: v1@5595,2710 5680,2625 5680,1905 5766.57,1818.43 6365,1818.43 6608.43,1818.43 6615,1825 C29.2@6615,1720
  Bottom Layer w20: v1(3605,4198.32) 3806.68,4198.32 5290,2715 v1(5590,2715)
PA6: R42.2 U1.22 U10.1 | length 4032.6
  Top Layer w10: U1.22 3538.74,4178.74 v1@3595,4235
  Top Layer w20: R42.2@6100,3325.19 6100,3350 6175,3425 6340,3425 U10.1
  Bottom Layer w20: v1(3605,4250) 3650,4295 3805,4295 5195,2905 5415,2905 6000,3490 6105,3490 v1(6170,3425)
PA7: R44.1 U1.23 U10.7 | length 5375.1
  Top Layer w10: U1.23 3519.06,4229.06 v1(3545,4255)
  Top Layer w20: U10.7 6745,3430 6905,3430 R44.1@7010,3325
  Bottom Layer w20: v1(3545,4255) 3570,4230 3570,3605 4705,2470 5740,2470 6700,3430 v1(6800,3430)
PA9: J2.1 U1.42 | length 1008
  Top Layer w10: v1(2787.5,3812.5) 2831.89,3768.11 U1.42
  Bottom Layer w30: J2.1 2690,3910 v1(2787.5,3812.5)
PA10: J2.2 U1.43 | length 1116.1
  Top Layer w10: v1(2675,3825) 2751.57,3748.43 U1.43
  Bottom Layer w30: J2.2 2590,3910 v1(2675,3825)
PA11: U1.44 U13.1 | length 5439.3
  Top Layer w10: v1@2870,3710 2870,3720 2878.74,3728.74 U1.44
  Top Layer w20: U13.1 5450,2825 5490,2825 5535,2780 5535,2490 5595,2430 v1(5595,2345)
  Bottom Layer w30: v1(2860,3710) 2860,2560 3470,1950 5475,1950 5597.5,2072.5 v1@5597.5,2347.5
PA12: U1.45 U13.2 | length 5016.6
  Top Layer w10: v1(2950,3675) 2984.06,3709.06 U1.45
  Top Layer w20: U13.2 5395,2775 5490,2680 5490,2375
  Top Layer w30: v1(5260,2025) 5405,2025 5545,2165 5545,2320 5490,2375
  Bottom Layer w30: v1(2950,3675) 2950,2600 3525,2025 v1(5260,2025)
PB0: R32.2 U1.26 U10.8 | length 4603.3
  Top Layer w10: v1(3415,4325) 3415,4315 3460,4270 U1.26
  Top Layer w20: U10.8 6751.34,3795 6905.19,3795 R32.2
  Bottom Layer w10: v1(3415,4325) 3415,4380 3535,4500
  Bottom Layer w20: 3535,4500 5110,4500 5885,3725 6795,3725 v1(6865,3795)
PB1: R30.1 U1.27 U10.14 | length 3979.6
  Top Layer w10: v1(3364.41,4299.41) 3440.32,4223.51 U1.27
  Top Layer w20: R30.1 6215,3785 6330,3785 6377.13,3737.87 U10.14
  Bottom Layer w20: v1(3364.41,4299.41) 3364.41,4394.41 3500,4530 5200,4530 5945,3785 v1(6220,3785)
PB3: U1.55
PB4: U1.56
PB5: U1.57
PB6: U1.58
PB7: U1.59
PB8: U1.61 U5.2 U5.3 | length 2030.2
  Top Layer w10: U5.2 2205,2525 2500,2820 2985,2820 3578.11,3413.11 U1.61
  Top Layer w20: U5.3 U5.2
PB9: U1.62
PB10: U1.29 U5.4 | length 3147.4
  Top Layer w10: v1(3070,4360) 3075,4365 3185,4365 3400.95,4149.05 U1.29
  Top Layer w20: U5.4 2105,2505 2455,2855 2945,2855 3057.5,2967.5 v1@3057.5,3067.5
  Bottom Layer w10: v1(3052.5,3072.5) 3055,3075 3055,4345 v1(3070,4360)
PB11: U1.30 U5.1 | length 2935.1
  Top Layer w10: v1(3145,4305) 3215,4305 3381.26,4138.74 U1.30
  Top Layer w20: U5.1 2255,2510 2520,2775 3010,2775 v1@3097.5,2862.5
  Bottom Layer w10: v1@3095,2865 3095,4255 v1(3145,4305)
  other v1: 3090,2860
PB12: U1.33
PB13: U1.34
PB14: U1.35
PB15: U1.36
PC0: R43.2 U1.8 U11.1 | length 1933.9
  Top Layer w10: U1.8 3862.2,3787.8 4245,3405 4860,3405 v1(4875,3420)
  Top Layer w20: R43.2 v1(5114.81,3420) 5270,3420 U11.1
  Bottom Layer w10: v1(4875,3420) v1(5114.81,3420)
PC1: R45.1 U1.9 U11.7 | length 3812.4
  Top Layer w10: U1.9 3877.52,3807.48 4240,3445 v1(4305,3445)
  Top Layer w20: U11.7 5835,3470 5920,3385 R45.1 v1@5995,3315
  Bottom Layer w20: v1(4305,3445) 4295,3445 4300,3440 4315,3440 5135,2620 5715,2620 6005,2910 v1@6005,3325
  other v1: 6000,3320
PC2: R33.2 U1.10 U11.8 | length 4116.4
  Top Layer w10: U1.10 3907.84,3827.16 v1@3995,3740
  Top Layer w20: U11.8 5661.34,3770 5835,3770 ; R33.2 5920,3855 5835,3770 ; v1(5990,3400) 5990,3615 5835,3770
  Bottom Layer w20: v1(4005,3735) 4105,3735 5175,2665 5695,2665 5940,2910 5940,3360 v1@5977.5,3397.5
PC3: R31.1 U1.11 U11.14 | length 2490.9
  Top Layer w10: U1.11 3963.15,3846.85 v1(4010,3800) ; R31.1@5000,3860 R31.1@5010,3870
  Top Layer w20: R31.1@5010,3870 R31.1@5010,3895 ; R31.1 5125,3770 5277.09,3770 U11.14
  Top Layer w30: v1(4715,3195) 4765,3195 5000,3430 R31.1@5000,3860
  Bottom Layer w30: v1(4010,3800) 4110,3800 v1(4715,3195)
PC4: U1.24 U13.3 | length 2877.1
  Top Layer w10: U1.24 3499.37,4274.37 v1(3540,4315)
  Top Layer w20: U13.3 v1(5345,2950)
  Bottom Layer w20: v1(3540,4315) 3640,4415 3775,4415 5240,2950 v1(5345,2950)
PC5: U1.25 U13.4 | length 3689.7
  Top Layer w10: U1.25 3479.69,4244.69 3480,4245 v1(3480,4325)
  Top Layer w20: U13.4 v1(5295,3005)
  Bottom Layer w20: v1(3480,4325) 3480,4375 3565,4460 5060,4460 5295,4225 v1(5295,3005)
PC6: C17.2 R13.2 U1.37 U6.4 | length 2059.5
  Top Layer w10: U1.37 3311.54,3866.54 v1(3350,3905)
  Top Layer w30: U6.4 C17.2@3195,2204.8 ; C17.2 3205.2,2254.8 3130,2330 3130,2410.19 R13.2 v1@3210,2630
  Bottom Layer w10: v1(3210,2640) 3350,2780 v1(3350,3905)
PC7: C19.2 R18.2 U1.38 U7.4 | length 2073.1
  Top Layer w10: U1.38 3376.85,3846.85 v1(3395,3865)
  Top Layer w30: U7.4 C19.2@3495,2204.8 ; C19.2 R18.2@3505.2,2379.61
  Bottom Layer w10: v1(3395,3865) 3390,3860 3390,2415 v1(3505,2300)
PC8: C22.2 R36.2 U1.39 U8.4 | length 2164.5
  Top Layer w10: U1.39 3387.83,3827.17 v1(3420,3795)
  Top Layer w30: U8.4@3805.2,2064.53 C22.2 R36.2@3805.2,2389.61
  Bottom Layer w10: v1(3420,3795) 3420,2670 3795,2295 v1(3805,2295)
PC9: C24.2 R39.2 U1.40 U12.4 | length 2374.7
  Top Layer w10: U1.40 3312.52,3807.48 3390,3730 v1(3455,3730)
  Top Layer w30: U12.4 C24.2@4120,2204.8 ; C24.2 R39.2@4130.2,2389.61
  Bottom Layer w10: v1(3455,3730) 3455,2780 3930,2305 v1(4130,2305)
PC10: U1.51
PC11: U1.52
PC12: U1.53
PC13: U1.2
RESET: C1.1 R1.1 RESET.1 U1.7 | length 3858.5
  Top Layer w10: U1.7 3846.89,3768.11 4240,3375 4885,3375 4925,3415 4925,3795 C1.1
  Top Layer w30: R1.1 C1.1 4795,4140 5085,4430 v1(6140,4430)
  Bottom Layer w30: RESET.1@6140,4340 v1(6140,4430)
SWITCH_IN1_1: C18.2 J11.1 U6.1 | length 530.7
  Top Layer w30: U6.1 3205.2,1689.8 C18.2 3205.2,1484.8 3245,1445 J11.1@3245,1190
SWITCH_IN1_2: J11.2 R11.2 | length 164.4
  Top Layer w45: J11.2@3394.61,1185 R11.2@3394.61,1349.42
SWITCH_IN2_1: C20.2 J11.3 U7.1 | length 516
  Top Layer w45: C20.2@3495,1570.2 U7.1 ; C20.2 3505.2,1439.8 3544.21,1400.79 J11.3@3544.21,1190
SWITCH_IN2_2: J11.4 R19.2 | length 174.4
  Top Layer w45: J11.4@3693.82,1190 3693.82,1348.63 R19.2
SWITCH_IN3_1: C21.2 J11.5 U8.1 | length 515.6
  Top Layer w30: C21.2@3795,1570.2 U8.1 ; C21.2 3805.2,1499.8 3843.43,1461.57 J11.5@3843.43,1190
SWITCH_IN3_2: J11.6 R37.2 | length 162.8
  Top Layer w45: J11.6@3993.03,1190 R37.2@3993.03,1352.84
SWITCH_IN4_1: C23.2 J11.7 U12.1 | length 517.4
  Top Layer w45: U12.1 4130.2,1689.8 C23.2 4142.64,1547.56 J11.7@4142.64,1191.97
SWITCH_IN4_2: J11.8 R38.2 | length 167.8
  Top Layer w45: J11.8@4295,1191.97 R38.2
SWITCH_OUT_1: J15.1 R60.4 | length 418.1
  Top Layer w45: J15.1@4475,1190 4475,1495 R60.4
SWITCH_OUT_2: J15.3 R61.4 | length 418.5
  Top Layer w45: J15.3@4774.21,1190 4774.21,1494.21 R61.4
SWITCH_OUT_3: J15.5 R62.4 | length 418.8
  Top Layer w45: J15.5@5073.43,1190 5073.43,1493.43 R62.4
SWITCH_OUT_4: J15.7 R63.4 | length 421.3
  Top Layer w45: J15.7@5372.64,1191.97 5372.64,1482.64 R63.4
VCC3.3: C2.1 C9.1 C10.2 C11.1 C12.2 C14.2 C15.1 D1.1 D8.1 D10.1 J12.4 R1.2 R3.2 R5.2 R7.2 R9.2 R10.1 R12.2 R13.1 R14.1 R15.1 R16.1 R17.1 R18.1 R20.2 R36.1 R39.1 R55.1 R56.1 R57.1 R58.1 R59.1 U1.19 U1.32 U1.48 U1.64 U2.2 U4.2 U4.4 U5.8 U9.8 U10.4 U11.4 | length 24813.5
  Top Layer w10: v3@3190,3555 3259.21,3624.21 U1.48 ; v3(3225,4160) 3240,4160 3341.89,4058.11 U1.32 3341.89,3973.11 3495,3820 v1(3495,3795) ; v1(3235,4380) C2.1 3645,4325 3645,4130 3597.8,4082.8 U1.19 ; U1.64 3637.16,3437.84 3665,3410 v1(3665,3405) ; C9.1 C9.1@3670,3310 ; 4519.81,3930 4534.81,3945 R1.2
  Top Layer w20: v5(1980,2350) 2010,2320 2200,2320 2255,2265 U5.8 2255,2000 R10.1@2260,1995 ; v1(5050,3505) 5165,3505 5255,3595 5420,3595 5470,3545 U11.4 5470,3285 v1(5465,3280) R58.1 5400,3180 5520,3060 v1(5660,3060) R59.1 ; R14.1 5465,4050 v1(5475,4050) 5600,4050 R16.1 ; v1(5665,2805) 5731.06,2738.94 U9.8 5885,2665 v1(5945,2605) ; R55.1 6010,2190 v1(6070,2130) 6160,2130 6260,2230 6260,2945 6130,3075 6045,3075 6010,3040 R20.2 ; R17.1 6360,4175 6405,4220 6595,4220 6668.08,4146.92 6668.08,4076.92 v1(6675,4070) R15.1@6745,4000 ; D8.1@6365,1530 v1(6365,1645) D10.1@6365,1720 ; v1(6520,3645) 6545,3620 U10.4 6545,3280 6490,3225 6490,3150 6535,3105 v1(6535,3060) 6645,3060 6750,3165 R57.1@6750,3225
  Top Layer w45: R9.2 1944.62,4009.62 1905,3970 1760,3970 1719.62,4010.38 1719.62,4040 1595,4040 1595,4010 1485,3900 U2.2 1070,3810 1070,3320 1230.19,3159.81 C14.2 1445.19,3350 U4.4 U4.2 1595,3035 1625,3005 1915,3005 C15.1 ; J12.4@2579.8,2960.2 C12.2 2284.8,2960.2 2195,3050 2195,3395 2380,3580 C11.1 C10.2@2774.8,3580 ; J12.4 2860.19,2960 R5.2 ; C10.2 2775,3530 2800,3505 3145,3505 v3(3205,3565) ; R13.1 v4(3345,2390) 3365,2390 3465,2490 R18.1 R36.1 R39.1 ; C9.1@3670,3310 3670,3480 v1(3765,3575) ; v1(3975,3930) 4519.81,3930 ; R1.2 4495.19,3865.38 R3.2 4645,3700 v1(4775,3570) D1.1
  Bottom Layer w10: v1(3235,4380) 3235,4315 3494,4056 ; v1@3655,3405 v1(3665,3405) ; v1@3975,3920 v1(3975,3930)
  Bottom Layer w20: 3494,4056 3494,3566 v1@3655,3405 ; v1(5465,3280) 5535,3350 5535,3990 v1(5475,4050) ; v1(5660,3060) 5660,2810 v1(5665,2805) ; v1(6365,1645) 6070,1940 v1(6070,2130) 6070,2480 v1(5945,2605) 6465,2605 6535,2675 v1(6535,3060) ; v1(6520,3645) 6805,3645 6925,3765 6925,3880 6735,4070 v1(6675,4070)
  Bottom Layer w45: v5(1980,2350) 1760,2570 1760,2850 C15.1 2165,2855 2475,2855 J12.4 ; v3(3225,4160) 3205,4140 v3(3205,3565) 3145,3505 3145,2590 v4(3345,2390) ; v1(3765,3575) 3765,3710 v1@3975,3920 ; v1(4775,3570) 4985,3570 v1(5050,3505)
VCC5: C16.2 L1.2 U3.4 U4.3 | length 2217.3
  Top Layer w40: U3.4 1313.98,2163.98
  Top Layer w45: 1313.98,2163.98 1408.62,2258.62 L1.2 ; U4.3 1740,3155 2045,3155 2100,3100 2100,2588.62 L1.2 ; C16.2 1856.97,2171.65 L1.2
VCC12: D7.2 F1.1 J8.7 J10.7 J13.1 R11.1 R19.1 R37.1 R38.1 | length 7459.5
  Top Layer w45: F1.1 1090,1435 J13.1 1340,1065 1380,1025 2085,1025 ; J10.7 2175,1435 2085,1345 2085,1025 ; J8.7 2930,1430 2875,1375 2875,1025 ; R11.1 3365,1460 3325,1420 3325,1025 ; 3625,1020 3920,1020 ; R19.1 3665,1460 3625,1420 3625,1025 3325,1025 ; R37.1@3995,1465 3960,1465 3920,1425 3920,1020 ; R38.1@4280,1460 4210,1390 4210,1120 4110,1020 3920,1020 ; R38.1 4315,1480 4315,2364.78 D7.2 ; 2085,1025 2875,1025 ; 2875,1025 3325,1025
VCC12_R: C25.2 C26.2 C27.2 D7.1 R60.2 R61.2 R62.2 R63.2 U13.9 | length 2514.1
  Top Layer w20: C27.2@4895,2490.2 5020.2,2490.2 5095,2565 U13.9
  Top Layer w45: R60.2 R61.2 R62.2 R63.2 ; C26.2 4699.8,2570 4585,2570 ; 4710,2185 4710,2390 ; C25.2@4730,2795 4640,2705 D7.1 4585,2570 ; C27.2@4895,2490.2 4794.8,2390 4710,2390 ; 4585,2570 4585,2450 4645,2390 4710,2390
pads on no net: J1.2 J3.2 J8.1 J8.2 J8.4 J8.5 J8.9 J8.10 J8.11 J8.12 J10.1 J10.2 J10.9 J10.10 J10.11 J10.12 J14.3 J16.2 J17.2 KEY.3 KEY.4 RESET.3 RESET.4 U2.3 U2.6 U2.7 U3.6 U13.5 U13.6 U13.7 U13.10 U13.11 U13.12

## Polygon pours and split planes (outlines as drawn)
GND on Top Layer "Top Layer-No Net" (solid, pour order 8): 2150,2905 2150,2925 2150,4550 2150,4575 4950,4575 4950,4445 4950,2900
GND on Top Layer "Top Layer-No Net" (solid, pour order 33): 4946.46,4504.99 4949.99,4501.46 4950,4501.46
GND on Top Layer "Top Layer-No Net" (solid, pour order 5): 4950,2905 4950,2900 4945,2900 4950,2905
GND on Bottom Layer "Top Layer-No Net" (solid, pour order 4): 2150,4575 2150,4400 2150,3325 2150,2875 2550,2875 2575,2900 3600,2900 4950,2900 4950,2950 4950,4350 4950,4575

## Keep-outs
Keep-Out Layer:
  circle w10: c7305,1095 r92.52
  circle w10: c1065,1095 r92.52
  circle w10: c6445,2005 r92.52
  circle w10: c5810,2005 r92.52
  circle w10: c7300,4455 r92.52
  circle w10: c1065,4455 r92.52
  lines w10: 920,4590 7450,4590 7450,965 920,965 920,4590 ; 920,4590 920,4590

## Silkscreen, mask and mechanical layers (free items; w line width, h text height)
Top Overlay:
  lines w10: 5650,965 6605,965 6605,2175 5650,2175 5650,965 ; 6230,980 6230,1105 6530,1105 6530,980 6230,980
  text "GND" at 2425,4360 h60
  text "RXD" at 2540,4360 h60
  text "TXD" at 2645,4360 h60
  text "GND" at 7140,4185 h60 r90
  text "AD12" at 7140,4030 h60 r90
  text "GND" at 1085,3950 h60 r90
  text "GND" at 7140,3880 h60 r90
  text "VCC" at 1085,3820 h60 r90
  text "AD11" at 7140,3720 h60 r90
  text "TXD" at 1090,3665 h60 r90
  text "GND" at 7140,3570 h60 r90
  text "RXD" at 1090,3545 h60 r90
  text "AD8" at 7140,3430 h60 r90
  text "GND" at 7140,3285 h60 r90
  text "JTCK" at 2515,3270 h60 r90
  text "AD7" at 7140,3145 h60 r90
  text "JTMS" at 2515,3125 h60 r90
  text "GND" at 2515,3005 h60 r90
  text "GND" at 7135,2960 h60 r90
  text "VCC" at 2515,2885 h60 r90
  text "AD10" at 7135,2800 h60 r90
  text "GND" at 7135,2660 h60 r90
  text "AD9" at 7135,2510 h60 r90
  text "GND" at 7140,2330 h60 r90
  text "485_A" at 2730,2255 h60 r90
  text "AD6" at 7140,2205 h60 r90
  text "485_B" at 2735,2090 h60 r90
  text "GND" at 7140,2055 h60 r90
  text "AD5" at 7140,1905 h60 r90
  text "GND" at 7135,1735 h60 r90
  text "AD4(mA)" at 6925,1615 h60
  text "GND" at 7130,1425 h60 r90
  text "GND" at 5665,1320 h60
  text "AD1" at 6080,1320 h60
  text "GND" at 6225,1320 h60
  text "AD1" at 6535,1320 h60
  text "AD3(mA)" at 6930,1300 h60
  text "detection_1" at 3195,1275 h60
  text "detection_2" at 3510,1275 h60
  text "detection_3" at 3805,1275 h60
  text "detection_4" at 4110,1275 h60
  text "control_1" at 4430,1275 h60
  text "control_2" at 4735,1275 h60
  text "control_3" at 5040,1275 h60
  text "control_4" at 5350,1275 h60
  text "12V" at 1300,1270 h60
  text "GND" at 1455,1270 h60
  text "GND" at 6225,1120 h60
  text "AD1" at 6425,1120 h60
  text "GND" at 6690,1105 h60
  text "AD2" at 6885,1105 h60
Top Solder:
  text "ZS_004" at 6750,4475 h60
Mechanical 1:
  the board outline again, w10